# Altium PCB Board3.PcbDoc
Units mil, origin at the board's own origin, x right, y up, seen from the top; angles counter-clockwise.
Board outline 3500 x 2500 mil, 2 copper layers (Top Layer, Bottom Layer); 57 components, 43 nets, 249 pads, 50 vias.
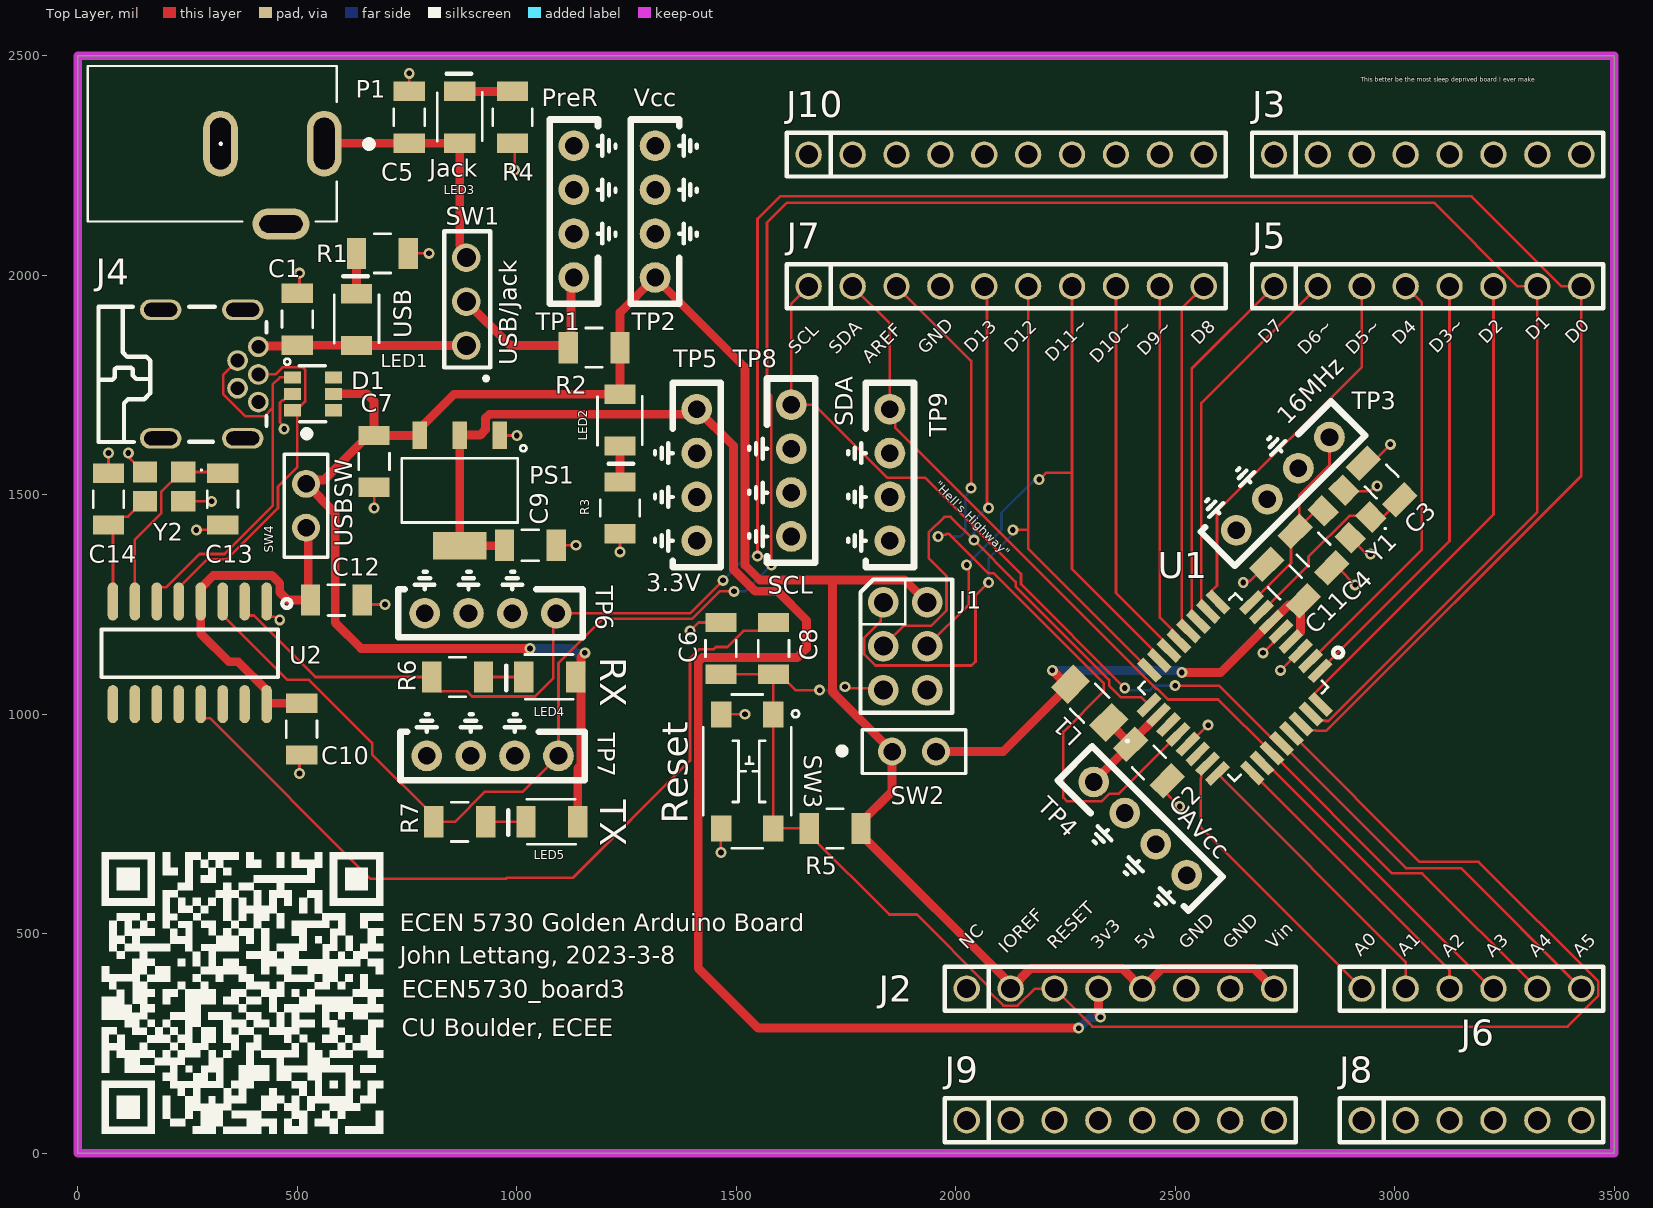
[diagram p0: Top Layer view]
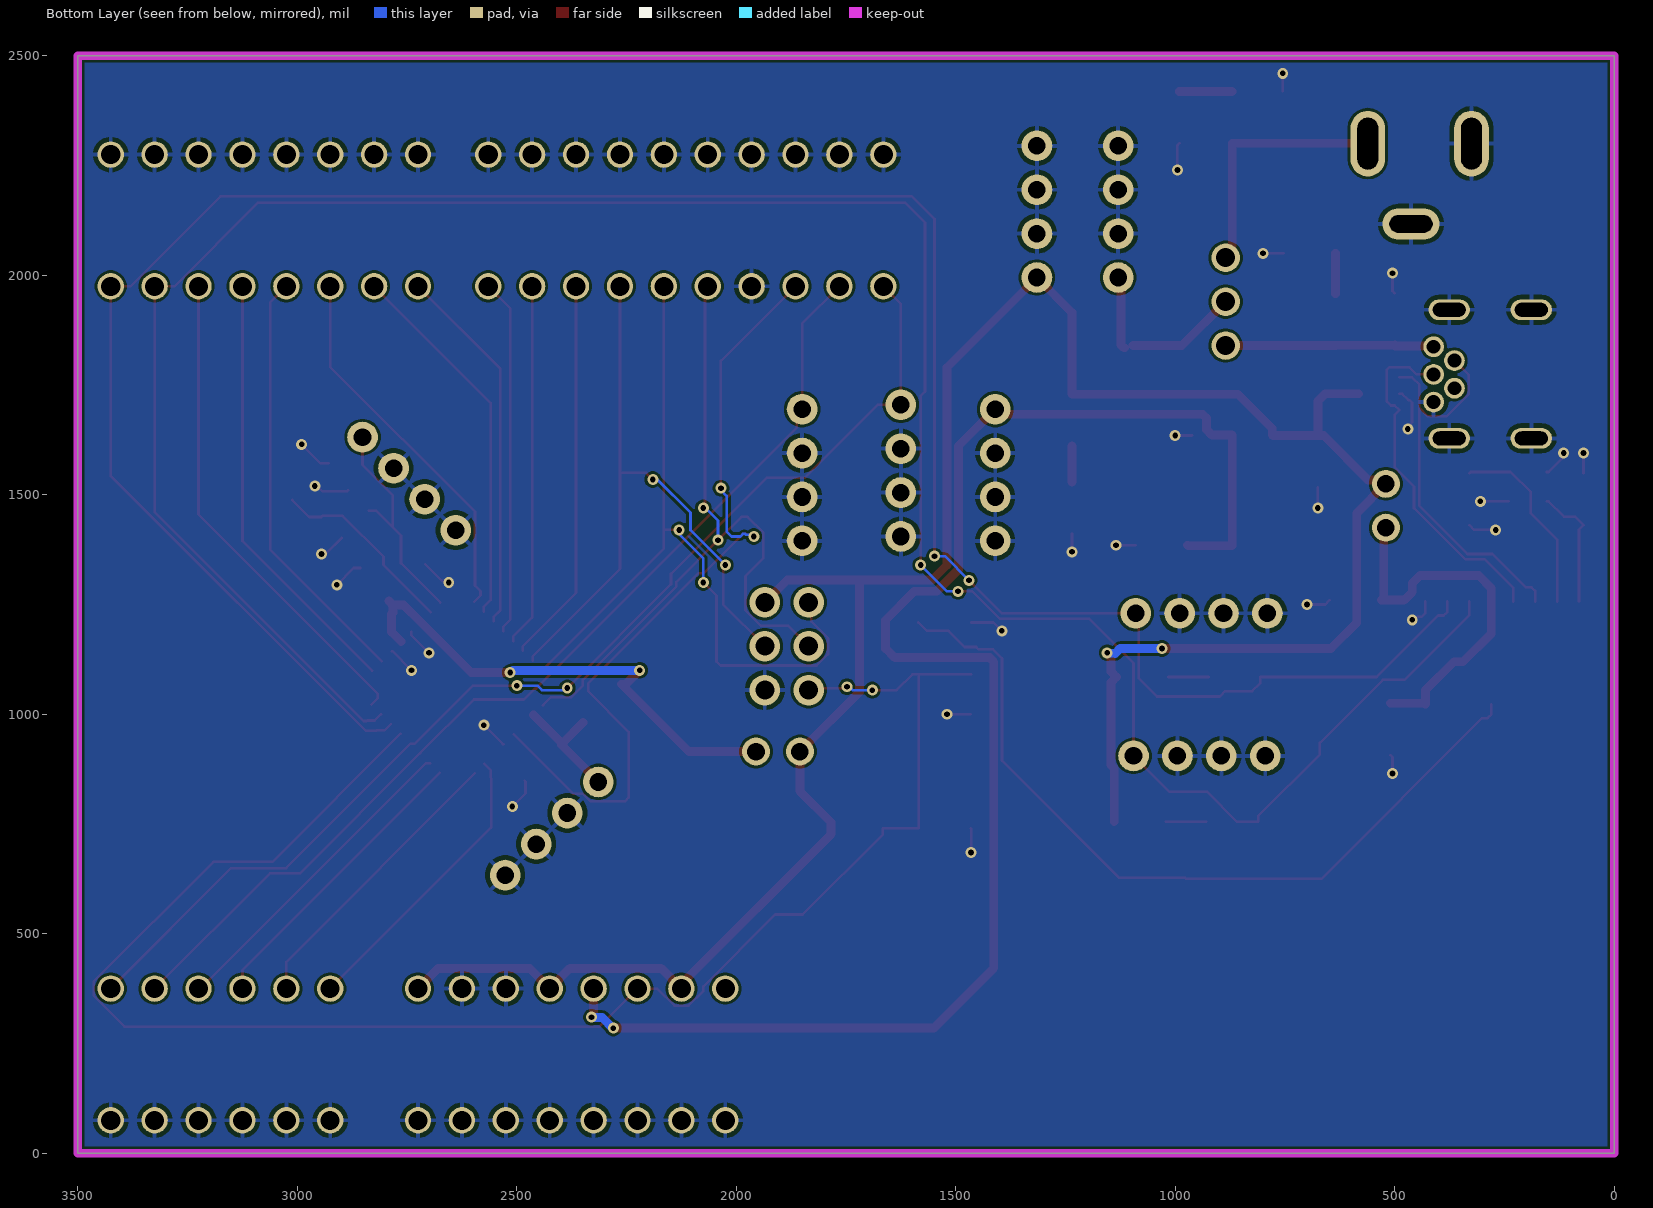
[diagram p1: Bottom Layer view, seen from below]
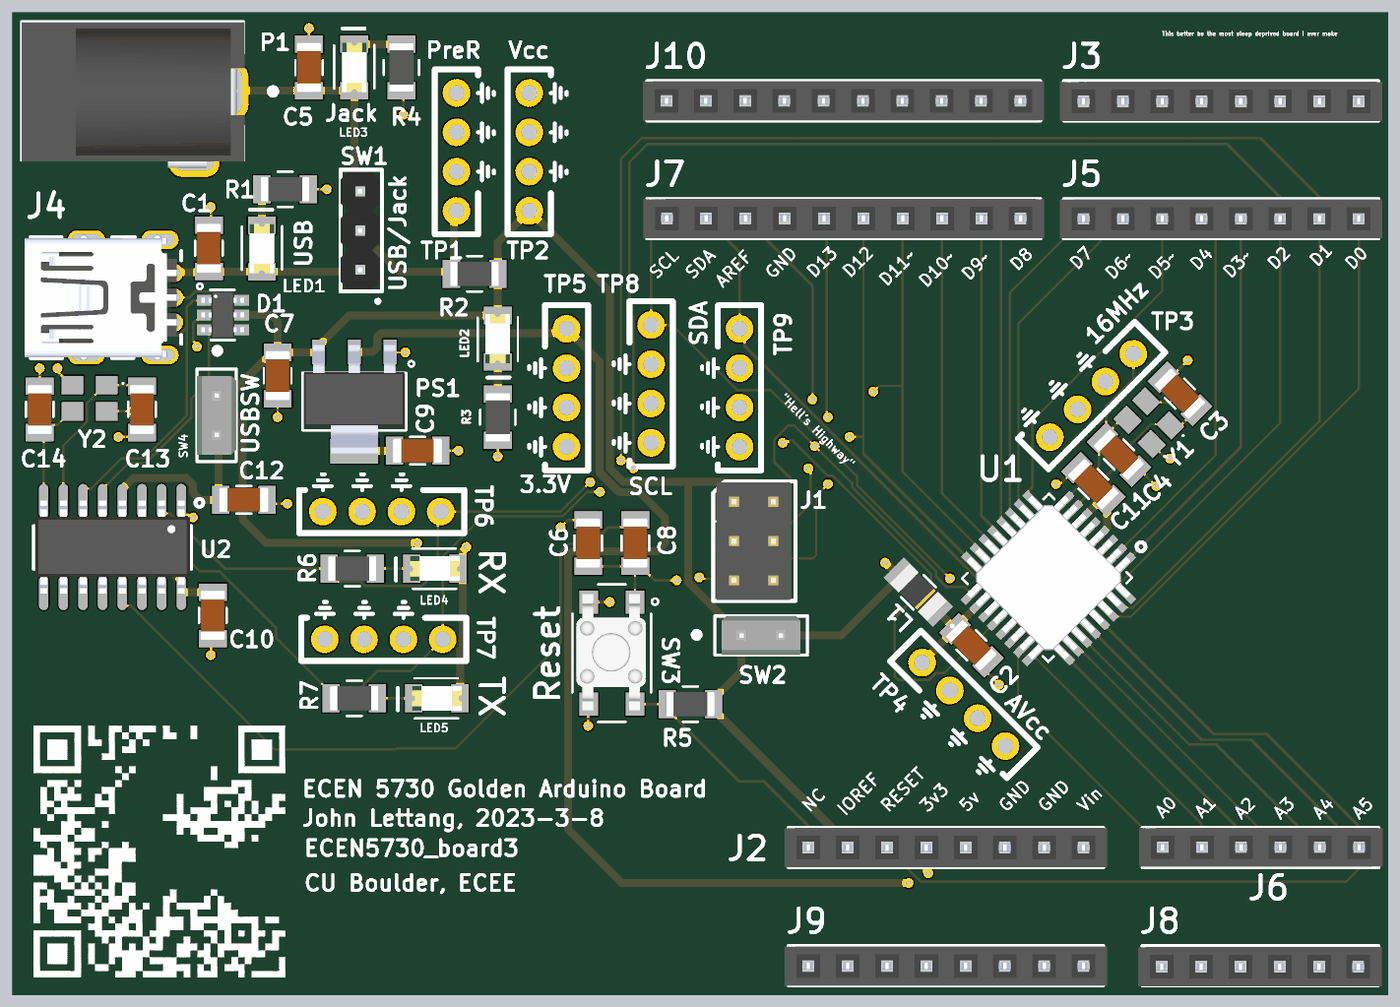
[diagram p2: 3D render of the assembled board from above, using the file's embedded part models]

## Layer stack, top to bottom
Top Solder: solder mask 0.4, Solder Resist, Dk 3.5
Top Layer: signal copper 1.4
Dielectric 1: dielectric 12.6, FR-4, Dk 4.8
Bottom Layer: signal copper 1.4
Bottom Solder: solder mask 0.4, Solder Resist, Dk 3.5

## Board outline
0,0 3500,0 3500,2500 0,2500

## Design rules (kind name [scope] priority, off if disabled: settings)
BoardOutlineClearance [All] p1: gap=10 ignorepadtopadclearanceinfootprint=FALSE except(0: Arc-SplitContinuation Track-SplitContinuation SMDPad-SplitContinuation THPad-SplitContinuation Via-SplitContinuation Fill-SplitContinuation Poly-SplitContinuation Region-SplitContinuation Text-SplitContinuation)
Clearance [All] p1: gap=6 ignorepadtopadclearanceinfootprint=FALSE
PlaneClearance [All] p1: clearance=10
PlaneConnect [All] p1: planeconnectstyle=Direct reliefexpansion=20 reliefentries=4 reliefconductorwidth=10 reliefairgap=10
PolygonConnect [All] p1: thpad.connectstyle=Relief thpad.reliefconductorwidth=10 thpad.reliefentries=4 thpad.polygonreliefangle="90 Angle" thpad.airgapwidth=10 smdpad.connectstyle=Direct smdpad.reliefconductorwidth=10 smdpad.reliefentries=4 smdpad.polygonreliefangle="90 Angle" smdpad.airgapwidth=10 via.connectstyle=Direct via.reliefconductorwidth=10 via.reliefentries=4 via.polygonreliefangle="90 Angle" via.airgapwidth=10
RoutingVias [All] p1: holewidth=13 width=25 viastyle="Through Hole" minholewidth=13 minwidth=25 maxholewidth=60 maxwidth=80
SolderMaskExpansion [All] p1: expansion=4 istentingtop=FALSE
UnRoutedNet [All] p1: checkbadconnections=TRUE
Width "Schematic Width Constraint_7" [InNet('+3.3')] p1: maxlimit=100 minlimit=10 preferedwidth=20 minimp=50.000000 maximp=50.000000 favimp=50.000000
Width "Schematic Width Constraint_6" [InNet('NetR2_1')] p2: maxlimit=100 minlimit=10 preferedwidth=20 minimp=50.000000 maximp=50.000000 favimp=50.000000
Width "Schematic Width Constraint_5" [InNet('5VJack')] p3: maxlimit=100 minlimit=10 preferedwidth=20 minimp=50.000000 maximp=50.000000 favimp=50.000000
Width "Schematic Width Constraint_4" [InNet('Vcc')] p4: maxlimit=100 minlimit=10 preferedwidth=20 minimp=50.000000 maximp=50.000000 favimp=50.000000
Width "Schematic Width Constraint_3" [InNet('5VUSB')] p5: maxlimit=100 minlimit=10 preferedwidth=20 minimp=50.000000 maximp=50.000000 favimp=50.000000
Width "Schematic Width Constraint_2" [InNet('AVcc')] p6: maxlimit=100 minlimit=10 preferedwidth=20 minimp=50.000000 maximp=50.000000 favimp=50.000000
Width [All] p7: maxlimit=100 minlimit=6 preferedwidth=6 minimp=50.000000 maximp=50.000000 favimp=50.000000
27 further rules are at their usual default settings.

## Components (designator, comment, footprint, x,y, rotation, side; value= is the part's Value field where it differs from the comment)
C1 "22uF" 1206_Passive_Capacitor 500,1900 r90 top
C2 "22uF" 1206_Passive_Capacitor 2440,890 r135 top
C3 "22pF" 1206_Passive_Capacitor 2970,1530 r315 top
C4 "22pF" 1206_Passive_Capacitor 2815,1375 r135 top
C5 "22uF" 1206_Passive_Capacitor 755,2360 r270 top
C6 "1uF" 1206_Passive_Capacitor 1465,1150 r270 top
C7 "22uF" 1206_Passive_Capacitor 675,1576 r90 top
C8 "22uF" 1206_Passive_Capacitor 1585,1150 r90 top
C9 "22uF" 1206_Passive_Capacitor 1031,1385 r180 top
C10 "22uF" 1206_Passive_Capacitor 510,966 r90 top
C11 "22uF" 1206_Passive_Capacitor 2750,1300 r315 top
C12 "22uF" 1206_Passive_Capacitor 589,1260 r180 top
C13 "22uF" 1206_Passive_Capacitor 330,1490 r270 top
C14 "22pF" 1206_Passive_Capacitor 70,1490 r270 top
D1 "SRV05-4-P-T7" TVS 535,1730 r0 top value="TVS DIODE 5.5V 6TSOP"
J1 "NRPN032PAEN-RC" ICSP 1835,1255 r0 top
J2 "PPTC081LFBN-RC" 8_PIN_ARD-PWR_100MIL 2025,375 r0 top value=Female
J3 "PPTC081LFBN-RC" "8_PIN_100MIL - Female" 2725,2275 r0 top value=Female
J4 "USB Mini" USB_MINI_B 300,1775 r270 top value="USB mini B"
J5 "PPTC081LFBN-RC" 8_PIN_ARD-DIG_100MIL 2725,1975 r0 top value=Female
J6 "PPTC061LFBN-RC" 6_PIN_ARD-Analog_100mil 2925,375 r0 top value=Female
J7 "PPTC101LFBN-RC" 10_PIN_ARDUINO_100MIL 1665,1975 r0 top value=Female
J8 "PPTC061LFBN-RC" "6_PIN_100MIL -Female" 2925,75 r0 top value=Female
J9 "PPTC081LFBN-RC" "8_PIN_100MIL - Female" 2025,75 r0 top value=Female
J10 "PPTC101LFBN-RC" "10_PIN_100MIL - Female" 1665,2275 r0 top value=Female
L1 "FB_10uH_1206" AIML-1206_ABR-M 2305,1025 r135 top
LED1 "USB" LED_1206 635,1899 r90 top value=Red
LED2 "Red" LED_1206 1235,1670 r270 top
LED3 "Jack" LED_1206 870,2360 r90 top value=Red
LED4 "RX" LED_1206 1075,1085 r180 top value=Blue
LED5 "TX" LED_1206 1080,755 r180 top value=Green
P1 "Power Jack" Power_Jack 561.22,2300 r180 top value="CONN PWR JACK 2X5.5MM SOLDER"
PS1 "AMS1117-3.3" LDO 870,1510 r180 top value="IC REG LINEAR 3.3V 800MA SOT223"
R1 "1k" 1206_Passive_Resitor 694,2050 r180 top value="1K Ohm"
R2 "500m" 1206_Passive_Resitor 1176,1835 r0 top value=500mOhm
R3 "1k" 1206_Passive_Resitor 1235,1470 r90 top value="1K Ohm"
R4 "1k" 1206_Passive_Resitor 990,2360 r90 top value="1K Ohm"
R5 "10k" 1206_Passive_Resitor 1725,740 r0 top value=10KOhm
R6 "1k" 1206_Passive_Resitor 865,1085 r180 top value="1K Ohm"
R7 "1k" 1206_Passive_Resitor 870,755 r180 top value="1K Ohm"
SW1 "USB/Jack" 3_PIN_100mil 885,1840 r90 top value="CONN HEADER VERT 3POS 2.54MM"
SW2 "SW_2Pin_100mil_Switch" 2Pin-Header-Conn 1855,915 r0 top
SW3 "Reset" Switch_JLC 1525,870 r270 top
SW4 "USBSW" 2Pin-Header-Conn 520,1525 r270 top
TP1 "PreR" TP10x_Probe 1130,2145 r90 top
TP2 "Vcc" TP10x_Probe 1315,2145 r90 top
TP3 "16MHz" TP10x_Probe 2745.36,1525.36 r225 top
TP4 "AVcc" TP10x_Probe 2420.36,739.64 r315 top
TP5 "3.3V" TP10x_Probe 1410,1545 r270 top
TP6 "3.3V" TP10x_Probe 940,1230 r180 top
TP7 "3.3V" TP10x_Probe 945,905 r180 top
TP8 "SCL" TP10x_Probe 1625,1555 r270 top
TP9 "SDA" TP10x_Probe 1850,1545 r270 top
U1 "ATMEGA328P-ANR" ATMega328P 2635,1060 r45 top value="IC MCU 8BIT 32KB FLASH 32TQFP"
U2 "CH340G" "USB to serial" 255,1140 r180 top value="USB to Serial"
Y1 "X322516MLB4SI" "Crystal resonator" 2890,1455 r135 top value=16MHz
Y2 "X322512MSB4SI" "Crystal resonator" 196.7,1516.5 r180 top value=12MHz

## Footprints (in the part's own frame and the unit in brackets; to place one, negate y for a bottom-side part, rotate by r counter-clockwise, add the part's x,y. Pads: shape width x height; smd on the part's side, far side on the other; paste and mask are expansions set on the pad)
2Pin-Header-Conn [mm]
  round 1.62 hole 1.02: 1(0,0) 2(2.54,0)
  silkscreen extent -3.02,-1.27 4.26,1.26, body extent -1.27,-1.27 3.81,1.27, height 8.13
3_PIN_100mil [mm]
  round 1.65 hole 1.1: 1(0,0) 2(2.54,0) 3(5.08,0)
  silkscreen extent -2,-1.4 6.6,1.27, body extent -1.14,-1.27 6.48,1.27, height 8.38
"6_PIN_100MIL -Female" [mil]
  round 60 hole 43.31: 1(0,0) 2(100,0) 3(200,0) 4(300,0) 5(400,0) 6(500,0)
  silkscreen extent -50,-50 550,50, body extent -61,-53 559,47, height 335
6_PIN_ARD-Analog_100mil [mil]
  round 60 hole 43.31: 1(0,0) 2(100,0) 3(200,0) 4(300,0) 5(400,0) 6(500,0)
  silkscreen extent -50,-50 550,50, body extent -59,-49 561,51, height 335
"8_PIN_100MIL - Female" [mil]
  round 60 hole 43.31: 1(0,0) 2(100,0) 3(200,0) 4(300,0) 5(400,0) 6(500,0) 7(600,0) 8(700,0)
  silkscreen extent -50,-50 750,50, body extent -60,-51 760,49, height 335
8_PIN_ARD-DIG_100MIL [mil]
  round 60 hole 43.31: 1(0,0) 2(100,0) 3(200,0) 4(300,0) 5(400,0) 6(500,0) 7(600,0) 8(700,0)
  silkscreen extent -50,-50 750,50, body extent -60,-50 760,50, height 335
8_PIN_ARD-PWR_100MIL [mil]
  round 60 hole 43.31: 1(0,0) 2(100,0) 3(200,0) 4(300,0) 5(400,0) 6(500,0) 7(600,0) 8(700,0)
  silkscreen extent -50,-50 750,50, body extent -60,-50 760,50, height 335
"10_PIN_100MIL - Female" [mil]
  round 60 hole 43.31: 1(0,0) 2(100,0) 3(200,0) 4(300,0) 5(400,0) 6(500,0) 7(600,0) 8(700,0) 9(800,0) 10(900,0)
  silkscreen extent -50,-50 950,50, body extent -61,-50 959,50, height 335
10_PIN_ARDUINO_100MIL [mil]
  round 60 hole 43.31: 1(0,0) 2(100,0) 3(200,0) 4(300,0) 5(400,0) 6(500,0) 7(600,0) 8(700,0) 9(800,0) 10(900,0)
  silkscreen extent -50,-50 950,50, body extent -60,-49 960,51, height 335
1206_Passive_Capacitor [mil]
  rect 44x71 smd: 1(-59,0) 2(59,0)
  silkscreen extent -19,-35 19,35, body extent -63,-31 63,32, height 50
1206_Passive_Resitor [mil]
  rect 44x71 smd: 1(-59,0) 2(59,0)
  silkscreen extent -19,-45 19,45, body extent -61,-31 61,31, height 26
AIML-1206_ABR-M [mil]
  rect 54x73 smd paste+0 mask+0: 1(-61.5,0) 2(61.5,0)
  silkscreen extent -124,-41 22,41, body extent -66,-36 66,36, height 55
ATMega328P [mm]
  rect 1.55x0.508 smd mask+0.025: 1(4.2,-2.794) 2(4.2,-2.007) 3(4.2,-1.194) 4(4.2,-0.406) 5(4.2,0.406) 6(4.2,1.194) 7(4.2,2.007) 8(4.2,2.794) 17(-4.2,2.794) 18(-4.2,2.007) 19(-4.2,1.194) 20(-4.2,0.406) 21(-4.2,-0.406) 22(-4.2,-1.194) 23(-4.2,-2.007) 24(-4.2,-2.794)
  rect 0.508x1.55 smd mask+0.025: 9(2.843,4.2) 10(2.056,4.2) 11(1.243,4.2) 12(0.455,4.2) 13(-0.357,4.2) 14(-1.145,4.2) 15(-1.958,4.2) 16(-2.745,4.2) 25(-2.745,-4.2) 26(-1.958,-4.2) 27(-1.145,-4.2) 28(-0.357,-4.2) 29(0.455,-4.2) 30(1.243,-4.2) 31(2.056,-4.2) 32(2.843,-4.2)
  silkscreen extent -3.94,-3.81 5.97,3.94, body extent -4.45,-4.47 4.55,4.53, height 1.16
"Crystal resonator" [mil]
  rect 55.11x47.24 smd: 1(-43.3,-35.43) 2(43.31,-35.43) 3(43.32,31.5) 4(-43.3,31.5)
  silkscreen extent -87,-42 -83,-38, body extent -65,-47 65,47, height 31
ICSP [mil]
  round 70 hole 43.31: 1(0,0) 2(0,-100) 3(0,-200) 4(100,0) 5(100,-100) 6(100,-200)
  silkscreen extent -52,-252 157,52, body extent -44,-250 146,50, height 330
LDO [mil]
  rect 33x63 smd: 1(-91,-126) 2(0,-126) 3(91,-126)
  rect 122x63 smd: 4(0,126)
  silkscreen extent -152,-103 132,73, body extent -128,-144 128,132, height 73
LED_1206 [mil]
  rect 44x71 smd: 1(-59,0) 2(59,0)
  silkscreen extent -54,-51 99,51, body extent -63,-31 63,31, height 28
Power_Jack [mm]
  oval 2x3.8 hole 1.2 slot 3 at 90 deg: 1(0,0) 2(6,0)
  oval 3.3x1.8 hole 1 slot 2.5 at 0 deg: 3(2.5,4.65)
  silkscreen extent -2.79,-4.5 13.68,4.5, body extent -0.76,-4.45 13.64,4.95, height 11.49
Switch_JLC [mm]
  rect 1.5x1.2 smd: 1(-3.3,1.5) 2(3.3,1.5) 3(-3.3,-1.5) 4(3.3,-1.5)
  silkscreen extent -4.44,-2.54 4.45,3, body extent -3.8,-2.29 3.7,2.21, height 3.7
TP10x_Probe [mil] "Small Probs footprint"
  round 70 hole 40: 1(-150,0) 2(-50,0) 2(50,0) 2(150,0)
  silkscreen extent -210,-95 210,55
TVS [mm]
  rect 1x0.7 smd mask+0.025: 1(-1.162,0.95) 2(-1.162,0) 3(-1.162,-0.95) 4(1.2,-0.95) 5(1.2,0) 6(1.2,0.95)
  silkscreen extent -1.65,-1.63 0.76,2.03, body extent -1.37,-1.44 1.38,1.46, height 1.1
"USB to serial" [mil]
  oval 24x86.61 smd: 1(-175,-117) 2(-125,-117) 3(-75,-117) 4(-25,-117) 5(25,-117) 6(75,-117) 7(125,-117) 8(175,-117) 9(175,117) 10(125,117) 11(75,117) 12(25,117) 13(-25,117) 14(-75,117) 15(-125,117) 16(-175,117)
  silkscreen extent -231,-122 201,56, body extent -197,-118 197,118, height 71
USB_MINI_B [mm]
  round 1.2 hole 0.8: 1(-1.58,2.826) 2(-0.78,1.622) 3(0.02,2.826) 4(0.82,1.622) 5(1.62,2.826)
  oval 1.2x2.4 hole 0.8 slot 1.9 at 90 deg: 6(-3.72,1.924) 7(3.72,1.924) 8(-3.72,-2.826) 9(3.72,-2.826)
  silkscreen extent -3.89,-6.42 3.93,3.3, body extent -4.04,-6.83 4.06,3.02, height 3.98

## Part data
C1 C2 C5 C7 C8 C9 C10 C11 C12 C13: library part C_22uF_1206, "22uF ±10% 25V X5R 1206 Multilayer Ceramic Capacitors MLCC - SMD/SMT RoHS", LCSC Part#=C12891, MFR Part #=CL31A226KAHNNNE, Datasheet=https://datasheet.lcsc.com/lcsc/1811031514_Samsung-Electro-Mechanics-CL31A226KAHNNNE_C12891.pdf, Type=basic
C3 C4 C14: library part C_22pF_1206, "22pF ±5% 1kV C0G 1206 Multilayer Ceramic Capacitors MLCC - SMD/SMT RoHS", LCSC Part#=C313096, MFR Part #=1206CG220J102NT, Datasheet=https://datasheet.lcsc.com/lcsc/1810311150_FH-Guangdong-Fenghua-Advanced-Tech-1206CG220J102NT_C313096.pdf, Type=Extended
C6: library part C_1uF_1206, "MULTILAYER CERAMIC CAPACITORS MLCC - SMD/SMT 1UF 50V 1206 ROHS", LCSC Part#=C1848, MFR Part #=CL31B105KBHNNNE, Digikey Link=https://www.digikey.com/product-detail/en/C1206C105M4RACTU/399-8150-1-ND/3471873/?itemSeq=304982366, Type=Basic
D1: library part D_TVS_Diode, "TVS SOT-23-6 ROHS", LCSC Part#=C85364, Datasheet=https://datasheet.lcsc.com/szlcsc/ProTek-Devices-SRV05-4-P-T7_C85364.pdf, MFR Part #=SRV05-4-P-T7, Type=Basic
J1: library part J_ICSP, "Connector Header Through Hole 6 position 0.079\" (2.00mm)", LCSC Part#=C124384, Digikey Link=https://www.digikey.com/product-detail/en/NRPN032PAEN-RC/S5801-03-ND/804955/?itemSeq=304982355, MFR Part #=NRPN032PAEN-RC, Type=Extended
J2: library part JF_8_PIN_FEMALE_ARD-Pwr, "8 Position Header Connector 0.100\" (2.54mm) Through Hole Tin", LCSC Part#=C27438, Digikey Link=https://www.digikey.com/product-detail/en/PPTC081LFBN-RC/S7006-ND/810147/?itemSeq=304982354, MFR Part #=PPTC081LFBN-RC, Type=Extended
J3 J9: library part JF_8_PIN_FEMALE, "8 Position Header Connector 0.100\" (2.54mm) Through Hole Tin", LCSC Part#=C27438, Digikey Link=https://www.digikey.com/product-detail/en/PPTC081LFBN-RC/S7006-ND/810147/?itemSeq=304982354, MFR Part #=PPTC081LFBN-RC, Type=Extended
J4: library part J_USB_B_Mini, "Through Hole USB Connectors RoHS", LCSC Part#=C46398, MFR Part #=920-462A2021D10102, Datasheet=https://datasheet.lcsc.com/szlcsc/2103081233_Jing-Extension-of-the-Electronic-Co-920-462A2021D10102_C46398.pdf, Type=Extended
J5: library part JF_8_PIN_FEMALE_ARD-Dig, "8 Position Header Connector 0.100\" (2.54mm) Through Hole Tin", LCSC Part#=C27438, Digikey Link=https://www.digikey.com/product-detail/en/PPTC081LFBN-RC/S7006-ND/810147/?itemSeq=304982354, MFR Part #=PPTC081LFBN-RC, Type=Extended
J6: library part JF_6_PIN_FEMALE_ARD-Anolog, "6 Position Header Connector 0.100\" (2.54mm) Through Hole Tin", LCSC Part#=C40877, Digikey Link=https://www.digikey.com/product-detail/en/PPTC061LFBN-RC/S7004-ND/810145/?itemSeq=304982353, MFR Part #=PPTC061LFBN-RC, Type=Extended
J7: library part JF_10_PIN_FEMALE_ARDUINO, "10 Position Header Connector 0.100\" (2.54mm) Through Hole Tin", LCSC Part#=C225507, Digikey Link=https://www.digikey.com/product-detail/en/PPTC101LFBN-RC/S7008-ND/810149/?itemSeq=304982352, MFR Part #=PPTC101LFBN-RC, Type=Extended
J8: library part JF_6_PIN_FEMALE, "6 Position Header Connector 0.100\" (2.54mm) Through Hole Tin", LCSC Part#=C40877, Digikey Link=https://www.digikey.com/product-detail/en/PPTC061LFBN-RC/S7004-ND/810145/?itemSeq=304982353, MFR Part #=PPTC061LFBN-RC, Type=Extended
J10: library part JF_10_PIN_FEMALE_, "10 Position Header Connector 0.100\" (2.54mm) Through Hole Tin", LCSC Part#=C225507, Digikey Link=https://www.digikey.com/product-detail/en/PPTC101LFBN-RC/S7008-ND/810149/?itemSeq=304982352, MFR Part #=PPTC101LFBN-RC, Type=Extended
L1: "25mA 10uH ±10% 800mΩ 1206  Inductors (SMD) ROHS", LCSC Part#=C1051, MFR Part #=CMI321609X100KT, Mfr_Name="FH (Guangdong Fenghua Advanced Tech)", Datasheet=https://datasheet.lcsc.com/lcsc/1810311314_FH--Guangdong-Fenghua-Advanced-Tech-CMI321609X100KT_C1051.pdf, Type=Basic
LED1 LED2 LED3: library part LED_RED_1206, "Red 621~631nm 1206 Light Emitting Diodes (LED) RoHS", LCSC Part#=C93133, MFR Part #=15-21/R6C-FQ1R1B/2T, Datasheet=https://datasheet.lcsc.com/szlcsc/1811151241_Everlight-Elec-15-21-R6C-FQ1R1B-2T_C93133.pdf, Type=Extended
LED4: library part LED_BLUE_1206, "blue 1206  Light Emitting Diodes (LED) ROHS", LCSC Part#=C130717, MFR Part #=NCD1206B1, Datasheet=https://datasheet.lcsc.com/lcsc/2008201033_Foshan-NationStar-Optoelectronics-NCD1206B1_C130717.pdf, Type=Extended
LED5: library part LED_GREEN_1206, "Green 513~528nm 1206 Light Emitting Diodes (LED) RoHS", LCSC Part#=C434439, MFR Part #=SZYY1206G, Datasheet=https://datasheet.lcsc.com/lcsc/2006301532_Yongyu-Photoelectric-SZYY1206G_C434439.pdf, Type=Extended
P1: library part "P_Power Jack", "Power Barrel Connector Jack 2.10mm ID (0.083\"), 5.50mm OD (0.217\") Through Hole, Right Angle", LCSC Part#=C136744, MFR Part #=PJ-102A, Digikey Link=https://www.digikey.com/product-detail/en/PJ-102A/CP-102A-ND/275425/?itemSeq=304982367, Type=Extended
PS1: library part PS_AMS_LDO_3v3, "LOW DROPOUT REGULATORS(LDO) POSITIVE FIXED 1.3V @ 800MA 15V 3.3V 1A SOT-223 ROHS", LCSC Part#=C6186, MFR Part #=AMS1117-3.3, Type=Basic
R1 R3 R4 R6 R7: library part R_1K_1206, "CHIP RESISTOR - SURFACE MOUNT 1KOHMS ±1% 1/4W 1206 ROHS", LCSC Part#=C4410, MFR Part #=RNCP1206FTD1K00CT, Digikey Link=https://www.digikey.com/product-detail/en/RNCP1206FTD1K00/RNCP1206FTD1K00CT-ND/2240675/?itemSeq=304982373, Type=Basic
R2: library part R_500mOhm_1206, "Resistors/Shunt 250mW 500mΩ ±800ppm/℃ ±5% 1206  Current Sense  Resistors ROHS", LCSC Part#=C247433, MFR Part #=1206W4J050KT5E, Datasheet=https://datasheet.lcsc.com/lcsc/1810301438_UNI-ROYAL-Uniroyal-Elec-1206W4J050KT5E_C247433.pdf, Type=Extended
R5: library part R_10KOhm_1206, "10 kOhms ±5% 0.25W, 1/4W Chip Resistor 1206 (3216 Metric) Automotive AEC-Q200 Thick Film", LCSC Part#=C17902, MFR Part #=RMCF1206FT10K0, Digikey Link=https://www.digikey.com/en/products/detail/stackpole-electronics-inc/RMCF1206FT10K0/1759669, Type=Basic
SW1: library part SW_3Pin_100mil_Switch, "Connector Header Through Hole 3 position 0.100\" (2.54mm)", LCSC Part#=C49257, MFR Part #=PREC003SAAN-RC, Digikey Link=https://www.digikey.com/product-detail/en/PREC003SAAN-RC/S1012EC-03-ND/2774851/?itemSeq=304982371, Type=Extended
SW2: "2Pin Header", LCSC Part#=C124375, Type=Extended
SW3: library part SW_Push_Button_JLC, "Tactile Switch SPST-NO Top Actuated Surface Mount", LCSC Part#=C2837550, MFR Part #=KH-4.5X4.5X4.3H-STM, Datasheet=https://datasheet.lcsc.com/lcsc/2106081532_Shenzhen-Kinghelm-Elec-KH-4.5X4.5X4.3H-STM_C2837550.pdf, Type=Extended
SW4: library part SW_2Pin_100mil_Switch, "2Pin Header", LCSC Part#=C124375, Type=Extended
TP1 TP2 TP3 TP4 TP5 TP6 TP7 TP8 TP9: library part TP_10x_Probe, "Test Point 300 mil centers"
U1: library part U_ATMega328P, "AVR AVR® ATmega Microcontroller IC 8-Bit 20MHz 32KB (16K x 16) FLASH 32-TQFP (7x7)", LCSC Part#=C14877, MFR Part #=ATMEGA328P-AU, Digikey Link=https://www.digikey.com/product-detail/en/ATMEGA328P-ANR/ATMEGA328P-ANRCT-ND/2774230/?itemSeq=304982365, Type=Basic
U2: library part U_USBtoSerial, "Transceiver USB 2.0 2Mbps SOP-16_150mil USB ICs RoHS", LCSC Part#=C14267, Datasheet=https://datasheet.lcsc.com/lcsc/2008191806_WCH-Jiangsu-Qin-Heng-CH340G_C14267.pdf, MFR Part #=CH340G, Type=Basic
Y1: library part X_16Mhz_Res, "±10ppm 16000000Hz -40℃~85℃ 贴片无源晶振 60Ω 9pF SMD3225-4P Crystals ROHS", LCSC Part#=C13738, MFR Part #=X322516MLB4SI, Type=Basic
Y2: library part X_12MHz_Res, "SMD Crystal Resonators 12MHz ±10ppm SMD-3225_4P RoHS", LCSC Part#=C9002, Datasheet=https://datasheet.lcsc.com/szlcsc/Yangxing-Tech-X322512MSB4SI_C9002.pdf, MFR Part #=X322512MSB4SI, Type=Basic

## Via types
v1: diameter 25, hole 13, Top Layer to Bottom Layer, 50 vias

## Nets (pads, with @x,y where several pads share a name; then routed paths per layer and width w, separated by ;. In a path a pad name is that pad's centre, name@x,y a point inside that pad or via, vN(x,y) a via of type N, cw(c..) or ccw(c..) an arc to the next point about the centre after c; other vN are vias at no path point)
5VJack: C5.2 LED3.1 P1.1 SW1.3 | length 576.4
  Top Layer w20: P1.1 562.22,2301 C5.2 LED3.1 870,2067.17 885,2052.17 SW1.3
5VUSB: C1.1 J4.1 LED1.1 SW1.1 | length 475.7
  Top Layer w20: J4.1 413.15,1839.1 498.1,1839.1 C1.1 500.5,1840.5 634.5,1840.5 LED1.1 SW1.1
328RX: J5.8 R6.2 TP6.1 U1.30 U2.2 | length 5563.2
  Top Layer w6: U2.2 380,1233.31 388.31,1224.99 401,1224.99 540.99,1085 R6.2 806,1071.5 825,1052.5 886.27,1052.5 898.27,1040.5 1041.73,1040.5 1083,1081.77 1083,1223 TP6.1 1395,1230 v1(1470,1305) ; v1(1548.5,1360) 1548.5,2128.5 1600,2180 3175.15,2180 3380.15,1975 J5.8 3425,1543.3 2844.35,962.66 2819.92,962.66 2819.41,963.17 2801.03,963.17 U1.30
  Bottom Layer w6: v1(1470,1305) 1525,1360 v1(1548.5,1360)
328TX: J5.7 R7.2 TP7.1 U1.31 U2.3 | length 5735.9
  Top Layer w6: U2.3 330,1225.69 477.26,1078.43 526.8,1078.43 670.61,934.61 670.61,908.89 811,768.5 R7.2 858.77,755 927.65,823.88 1013.88,823.88 TP7.1 1095,1116.23 1196.77,1218 1399.97,1218 1461.97,1280 v1(1495,1280) ; v1(1580,1340) 1580,1725.07 1570,1735.07 1570,2120 1615,2165 3090.15,2165 3280.15,1975 J5.7 3325,1460.28 2849.3,984.58 2841.85,984.58 2840.62,985.8 2823.65,985.8 U1.31
  Bottom Layer w6: v1(1495,1280) 1520,1280 v1(1580,1340)
+3.3: C9.2 J2.4 PS1.2 PS1.4 TP5.1 | length 3620.2
  Top Layer w20: C9.2 971,1384 PS1.4 PS1.2 916.5,1636 928.5,1648 928.5,1674.13 937.87,1683.5 1384.97,1683.5 1396.47,1695 TP5.1 1494,1611 1494,1329.23 1543.23,1280 1594.13,1280 1660,1214.13 1660,1150 1639,1129 1422.87,1129 1413.5,1119.63 1413.5,1086.63 1413.5,421.5 1550,285 v1(2280,285) ; J2.4 2325,316.35 2330,311.35 v1(2330,310)
  Bottom Layer w20: v1(2280,285) 2281.35,285 2305.4,309.04 2329.04,309.04 v1(2330,310)
ArdVcc: C11.2 L1.2 SW2.2 U1.4 U1.6 | length 1159.6
  Top Layer w6: L1.2@2258.15,1065.13 L1.2
  Top Layer w20: SW2.2 2108.03,915 L1.2@2258.15,1065.13 ; v1(2220,1100) 2251.51,1068.49 L1.2 ; v1(2515,1095) 2603.53,1095 U1.6 2757.27,1248.73 C11.2@2782.17,1248.73 ; U1.4 2785.26,1187.63 2785.26,1228.68 2782.17,1231.76 C11.2@2782.17,1248.73 ; C11.2 C11.2@2782.17,1248.73
  Bottom Layer w20: v1(2220,1100) 2508.65,1100 2513.65,1095 v1(2515,1095)
AREF: J7.3 U1.20 | length 1853.8
  Top Layer w6: J7.3 2035,1805 v1(2035,1515) ; v1(1960,1405) 1963.64,1408.64 1976.23,1408.64 1978.5,1410.91 1984.5,1410.91 2073.91,1321.5 2086.12,1321.5 2337.51,1070.11 2337.51,1052.51 2245,960 2245,810 2253.29,801.71 2332.51,801.71 2349.8,819 2371.37,819 U1.20
  Bottom Layer w6: v1(1960,1405) 1963.64,1408.64 1977.26,1408.64 1979.53,1410.91 1984.5,1410.91 1990.41,1405 2010.32,1405 2021.82,1416.49 2021.82,1497.78 2035,1510.96 v1(2035,1515)
AVcc: C2.2 L1.1 TP4.1 U1.18 | length 284.9
  Top Layer w20: TP4.1 2314.29,846.72 2398.28,930.71 C2.2 ; L1.1 C2.2 ; U1.18 2398.28,935 C2.2
D+: D1.3 J4.3 U2.5 | length 802.8
  Top Layer w6: U2.5 230,1288.31 294.9,1353.2 339.4,1353.2 455.88,1469.68 455.88,1518.7 500,1562.83 500,1681.83 D1.3 500.01,1703.38 508.8,1703.38 517.92,1712.49 517.92,1784.91 512.65,1790.18 465.82,1790.18 449.85,1774.22 J4.3
D-: D1.1 J4.2 U2.6 | length 927.8
  Top Layer w6: U2.6 180,1280.69 188.31,1289.01 201,1289.01 277.2,1365.2 334.43,1365.2 443.88,1474.65 443.88,1697.71 ; J4.2 331.24,1773.09 331.24,1729.21 381.85,1678.6 424.77,1678.6 443.88,1697.71 ; D1.1 460.55,1767.4 443.88,1750.73 443.88,1697.71
DTR: C8.2 U2.13 | length 1862.1
  Top Layer w6: U2.13 280,999.31 288.31,990.99 301,990.99 666.99,625 975,625 977.5,627.5 1127.5,627.5 1394.5,894.5 1394.5,1127.5 1415,1148 1448,1148 1453.36,1153.36 1479.59,1153.36 1516.23,1190 1566,1190 C8.2
GND: C1.2 C2.1 C3.1 C4.1 C5.1 C6.1 C7.1 C9.1 C10.1 C11.1 C12.1 C13.2 C14.1 D1.2 J1.6 J2.6 J2.7 J3.1 J3.2 J3.3 J3.4 J3.5 J3.6 J3.7 J3.8 J4.5 J4.6 J4.7 J4.8 J4.9 J7.4 J8.1 J8.2 J8.3 J8.4 J8.5 J8.6 J9.1 J9.2 J9.3 J9.4 J9.5 J9.6 J9.7 J9.8 J10.1 J10.2 J10.3 J10.4 J10.5 J10.6 J10.7 J10.8 J10.9 J10.10 P1.2 P1.3 PS1.1 R1.1 R3.1 R4.1 SW3.3 SW3.4 TP1.2 TP2.2 TP3.2 TP4.2 TP5.2 TP6.2 TP7.2 TP8.2 TP9.2 U1.3 U1.5 U1.21 U2.1 Y1.2 Y1.4 Y2.2 Y2.4 | length 1686.1
  Top Layer w6: C14.1 v1(70,1595) ; v1(115,1595) 118.64,1591.36 118.64,1582.74 149.45,1551.93 Y2.2 ; Y2.4 v1(305,1485) ; v1(270,1420) 319,1420 C13.2 ; U2.1 430,1230.56 438.31,1222.25 447.61,1222.25 454.86,1215 v1(460,1215) ; v1(470,1650) 470,1655.14 460.55,1664.59 460.55,1710.11 465.82,1715.38 468.7,1715.38 483.33,1730 D1.2 ; C1.2 505,1964 v1(505,2005) ; v1(505,865) 505,902 C10.1 ; C12.1 658,1250 v1(700,1250) ; v1(675,1470) C7.1 ; R1.1 v1(800,2050) ; C5.1 v1(755,2460) ; PS1.1 962,1635 v1(1000,1635) ; R4.1 995,2296 v1(995,2240) ; C9.1 v1(1135,1385) ; v1(1235,1370) R3.1 ; v1(1395,1190) 1414,1209 C6.1 ; v1(1465,685) 1465,739.13 SW3.4 ; SW3.3 1466.02,1000 v1(1520,1000) ; C2.1 2480.15,846.72 2480.15,819.85 v1(2510,790) ; U1.21 2531.76,931.76 v1(2575,975) ; v1(2655,1300) 2658.64,1303.64 2670.2,1303.64 C11.1 ; v1(2700,1140) 2740.61,1180.61 U1.5 ; v1(2740,1100) 2783.69,1143.69 U1.3 ; C4.1 2871.72,1333.28 v1(2910,1295) ; Y1.2 2887.21,1507.9 2942.75,1507.9 2954.86,1520 v1(2960,1520) ; Y1.4 2931.82,1368.64 2941.36,1368.64 v1(2945,1365) ; C3.1 2946.72,1571.72 v1(2990,1615)
MISO: J1.1 J7.6 U1.16 | length 1766.2
  Top Layer w6: J1.1 1828.77,1248.77 1828.77,1211 1791,1173.23 1791,1136.77 1816.77,1111 2036,1111 2045,1120 2045,1270 v1(2075,1300) ; v1(2130,1420) 2165,1420 ; J7.6 2165,1420 ; U1.16 2165,1377.17 2165,1420
  Bottom Layer w6: v1(2075,1300) 2075,1355 2132.51,1412.51 2132.51,1417.49 v1(2130,1420)
MOSI: J1.5 J7.7 U1.15 | length 1512.5
  Top Layer w6: J1.5 2030,1250 2030,1336.49 2026.49,1340 v1(2025,1340) ; v1(2190,1535) 2190.41,1535 2205.41,1550 2265,1550 ; J7.7 2265,1550 ; U1.15 2463.58,1132.33 2265,1330.91 2265,1550
  Bottom Layer w6: v1(2025,1340) 2104.32,1419.32 2104.32,1459.32 2180,1535 v1(2190,1535)
NetJ5_1: J5.1 U1.11 | length 847.3
  Top Layer w6: U1.11 2552.68,1221.42 2537.66,1236.44 2537.66,1787.66 J5.1
NetJ5_2: J5.2 U1.10 | length 857.3
  Top Layer w6: U1.10 2575.3,1244.05 2559.58,1259.77 2559.58,1709.58 J5.2
NetJ5_3: J5.3 U1.9 | length 866.7
  Top Layer w6: U1.9 2582.72,1270.57 2582.72,1280.47 2595.29,1293.04 2595.29,1461.86 2925,1791.57 J5.3
NetJ5_4: J5.4 U1.2 | length 974
  Top Layer w6: U1.2 3061.38,1374.66 3061.38,1938.62 J5.4
NetJ5_5: J5.5 U1.1 | length 998.2
  Top Layer w6: U1.1 3125,1394.44 J5.5
NetJ5_6: J5.6 U1.32 | length 1128
  Top Layer w6: U1.32 2816.57,1036.73 2816.57,1046.63 3225,1455.06 J5.6
NetJ6_1: J6.1 U1.23 | length 670.7
  Top Layer w6: U1.23 2559.43,872.71 2559.43,855.74 2558.21,854.52 2558.21,741.79 J6.1
NetJ6_2: J6.2 U1.24 | length 668.1
  Top Layer w6: U1.24 3025,436.15 J6.2
NetJ6_3: J6.3 U1.25 | length 677.8
  Top Layer w6: U1.25 3125,417.16 J6.3
NetJ6_4: J6.4 U1.26 | length 740.3
  Top Layer w6: U1.26 2707.33,888.58 3220.9,375 J6.4
NetJ7_8: J7.8 U1.14 | length 880.2
  Top Layer w6: J7.8 2365,1276.16 2486.21,1154.95 U1.14
NetJ7_9: J7.9 U1.13 | length 825.9
  Top Layer w6: J7.9 2465,1220 2508.13,1176.87 U1.13
NetJ7_10: J7.10 U1.12 | length 812.6
  Top Layer w6: U1.12 2530.75,1199.5 2515.03,1215.23 2515.03,1925.03 J7.10
NetLED1_2: LED1.2 R1.2 | length 92
  Top Layer w20: LED1.2 R1.2
NetLED2_2: LED2.2 R3.2 | length 82
  Top Layer w20: R3.2 LED2.2
NetLED3_2: LED3.2 R4.2 | length 120
  Top Layer w20: LED3.2 R4.2
NetLED4_2: LED4.2 R6.1 | length 92
  Top Layer w6: R6.1 LED4.2
NetLED5_2: LED5.2 R7.1 | length 92
  Top Layer w6: R7.1 LED5.2
NetR2_1: R2.1 SW1.2 TP1.1 | length 419.8
  Top Layer w20: SW1.2 985,1840 R2.1@1096,1840 ; R2.1@1115,1835 R2.1 1123.5,1841.5 1123.5,1988.5 TP1.1
Osc_1: C3.2 U1.7 Y1.1 | length 434.8
  Top Layer w6: U1.7 2803.68,1340.4 2803.68,1359.13 2896.76,1452.21 2942.89,1452.21 Y1.1 2972.87,1449.43 C3.2
Osc_2: C4.2 TP3.1 U1.8 Y1.3 | length 519.8
  Top Layer w6: U1.8 2763.73,1344.3 2763.73,1407.17 C4.2 C4.2@2782.83,1426.27 ; Y1.3 2819.92,1463.36 C4.2@2782.83,1426.27 ; TP3.1 2851.42,1567.92 2782.83,1499.32 C4.2@2782.83,1426.27
Reset: C6.2 C8.1 J1.3 J2.3 R5.1 SW3.1 SW3.2 U1.29 | length 3850.5
  Top Layer w6: C6.2 C8.1 ; v1(1690,1055) 1634.5,1055 1598.5,1091 C8.1 ; v1(1747.65,1062.65) 1751.29,1059.02 1830.98,1059.02 J1.3 ; U1.29 3056.63,663.73 3191.43,663.73 3464,391.15 3464,358.85 3393.65,288.5 2311.5,288.5 J2.3 2180.15,375 2141.15,336 2108.85,336 2075,369.85 2075,380.15 1911.33,543.83 1848.67,543.83 1665.92,726.58 1665.92,740.08 SW3.2 SW3.1 1584.06,1090.06 C8.1
  Bottom Layer w6: v1(1690,1055) 1734.86,1055 1742.51,1062.65 v1(1747.65,1062.65)
SCK: J1.2 J7.5 U1.17 | length 1679.1
  Top Layer w6: J1.2 1882.01,1202.01 1944.24,1202.01 1979,1236.77 1979,1315.09 1938.5,1355.59 1938.5,1413.91 1974.14,1449.54 1988.49,1449.54 v1(2041.51,1396.51) 2136.68,1301.35 2136.68,1291.35 2349.51,1078.51 2349.51,1065.08 2376.14,1038.45 2422.7,1038.45 U1.17 ; J7.5 2071.36,1968.64 2071.36,1473.64 v1(2075,1470)
  Bottom Layer w6: v1(2041.51,1396.51) 2041.51,1441.51 2070.01,1470.01 v1(2075,1470)
SCL: J6.6 J7.1 TP8.1 U1.28 | length 2659.5
  Top Layer w6: J7.1 1625,1935 TP8.1 1677.77,1705 1843.77,1539 1929.43,1539 2148.68,1319.75 2148.68,1296.32 v1(2385,1060) ; v1(2500,1065) 2600.2,1065 2732.07,933.13 U1.28 3025.6,649.5 3150.5,649.5 J6.6
  Bottom Layer w6: v1(2385,1060) 2389.65,1060 2394.65,1055 2442.43,1055 2452.43,1065 v1(2500,1065)
SDA: J6.5 J7.2 TP9.1 U1.27 | length 2354.8
  Top Layer w6: J7.2 1850,1890 TP9.1 1862.25,1682.75 1862.25,1652.35 2456.09,1058.5 2458.53,1058.5 2483.53,1033.5 2597.76,1033.5 U1.27 2993.76,637.5 3062.5,637.5 J6.5
V3: C10.2 C12.2 SW4.2 U2.4 U2.16 | length 885.4
  Top Layer w20: U2.16 U2.16@430,1023.15 ; C10.2 431.85,1025 U2.16@430,1023.15 ; SW4.2 525,1420 525,1265 C12.2 478,1260 459.8,1278.2 459.8,1298.11 441.6,1316.31 309.08,1316.31 280,1287.22 280,1183.69 344.31,1119.38 364.92,1119.38 430,1054.31 U2.16@430,1023.15
Vcc: C7.2 D1.5 J1.4 J2.2 J2.5 J2.8 LED2.1 LED4.1 LED5.1 PS1.3 R2.2 R5.2 SW2.1 SW4.1 TP2.1 | length 5653.6
  Top Layer w20: D1.5 658.28,1730 675,1713.28 C7.2 ; v1(1030,1150) 645,1150 586.69,1208.31 586.69,1458.31 SW4.1 528.38,1533.38 559.88,1533.38 661.5,1635 C7.2 ; LED5.1 1139,876.88 1146,883.88 1146,1073 LED4.1 1146,1097 1146,1129.65 1155,1138.65 v1(1155,1140) ; J1.4 1884,1306 1719,1306 ; J2.8 2679,421 2471,421 J2.5 2379,421 2171,421 J2.2 2125,385.5 1784,726.5 R5.2 1784,753.5 1855,824.5 SW2.1 1719,1051 1719,1306 ; C7.2 778,1635 PS1.3 779,1651 857,1729 LED2.1 R2.2 1235,1915 TP2.1 1520,1790 1520,1340 1554,1306 1719,1306
  Bottom Layer w20: v1(1030,1150) 1125,1150 1136.72,1138.28 1137.47,1139.04 1154.04,1139.04 v1(1155,1140)
XI: C13.1 U2.7 Y2.1 | length 434
  Top Layer w6: U2.7 130,1397.72 189.93,1457.65 189.93,1505.8 236.07,1551.93 Y2.1 327.07,1551.93 C13.1
XO: C14.2 U2.8 Y2.3 | length 283.9
  Top Layer w6: U2.8 80,1421 C14.2 89,1450 114.44,1450 149.44,1485 Y2.3
pads on no net: D1.4 D1.6 J2.1 J4.4 U1.19 U1.22 U2.9 U2.10 U2.11 U2.12 U2.14 U2.15

## Polygon pours and split planes (outlines as drawn)
GND on Bottom Layer "GND_L02_P000" (solid, pour order 0): 0,2500 0,0 3500,0 3500,2500

## Keep-outs
Keep-Out Layer:
  the board outline again, w20

## Silkscreen, mask and mechanical layers (free items; w line width, h text height)
Top Overlay:
  drawing of 28 lines, arcs and shapes, not listed
  text "This better be the most sleep deprived board I ever make" at 2923,2441.33 h10
  text "\"Hell's Highway\"" at 1950.37,1519.71 h20 r315
  text "ECEN 5730 Golden Arduino Board" at 733,506 h40
  text "John Lettang, 2023-3-8" at 733,431.33 h40
  text "ECEN5730_board3" at 738,354.66 h40
  text "CU Boulder, ECEE" at 738,266.33 h40

## Text inside footprints (layer, text, board x,y; h text height)
J2: Top Overlay "NC" at 2025,462.07 h30 r45; Top Overlay "IOREF" at 2115,453.39 h30 r45; Top Overlay "3v3" at 2325,462.07 h30 r45; Top Overlay "5v" at 2425,462.07 h30 r45; Top Overlay "GND" at 2525,462.07 h30 r45; Top Overlay "GND" at 2625,462.07 h30 r45; Top Overlay "Vin" at 2725,462.07 h30 r45; Top Overlay "RESET" at 2225,462.07 h30 r45
J5: Top Overlay "D5~" at 2906,1817.07 h30 r45; Top Overlay "D0" at 3406,1841.81 h30 r45; Top Overlay "D1" at 3316,1850 h30 r45; Top Overlay "D2" at 3209,1842 h30 r45; Top Overlay "D3~" at 3096,1820 h30 r45; Top Overlay "D4" at 3012,1840 h30 r45; Top Overlay "D6~" at 2796,1817.07 h30 r45; Top Overlay "D7" at 2706,1841.81 h30 r45
J6: Top Overlay "A1" at 3023,447 h30 r45; Top Overlay "A0" at 2923,447 h30 r45; Top Overlay "A2" at 3123,444.07 h30 r45; Top Overlay "A3" at 3223,444.07 h30 r45; Top Overlay "A4" at 3323,444.07 h30 r45; Top Overlay "A5" at 3423,444.07 h30 r45
J7: Top Overlay "SCL" at 1636,1818.21 h30 r45; Top Overlay "SDA" at 1728,1818.21 h30 r45; Top Overlay "AREF" at 1804,1797 h30 r45; Top Overlay "GND" at 1931,1818.21 h30 r45; Top Overlay "D13" at 2037,1821.74 h30 r45; Top Overlay "D12" at 2128,1821.74 h30 r45; Top Overlay "D11~" at 2221,1800.53 h30 r45; Top Overlay "D10~" at 2322,1797 h30 r45; Top Overlay "D9~" at 2431,1814.67 h30 r45; Top Overlay "D8" at 2554,1839.41 h30 r45